# Altium PCB PCB.PcbDoc (part 2 of 3)
Units mm, origin at the board's own origin, x right, y up, seen from the top; angles counter-clockwise.
Board outline 50 x 32.5 mm, 10 copper layers (Top (GND), L2 (HS), L3 (GND), L4 (VCC), L5 (S), L6 S(), L7 (VCC), L8 (GND), L9 (VCC), Bottom (S)), stack 1.18 mm thick; 115 components, 126 nets, 603 pads, 417 vias.
Unrouted connection lines stored in the file: 2.
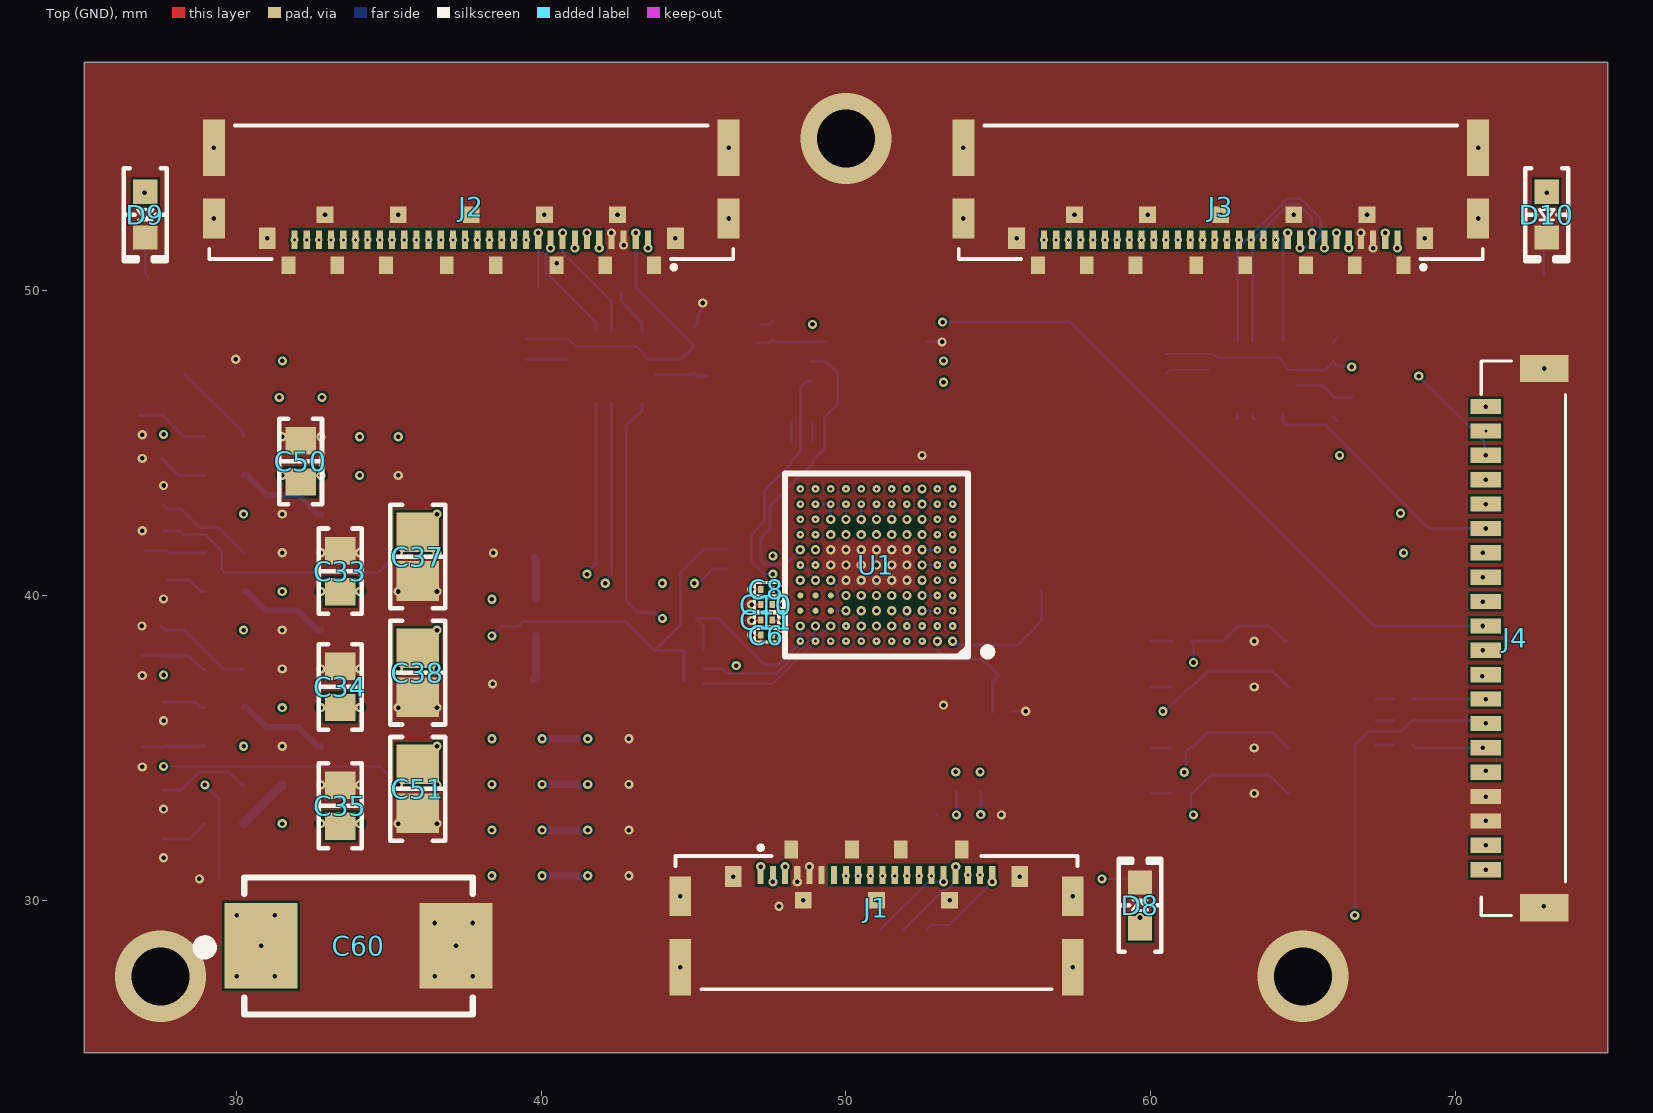
[diagram p0: Top (GND) view]

## Via types
v1: diameter 0.3, hole 0.15, Top (GND) to Bottom (S), 287 vias
v2: diameter 0.25, hole 0.1, Top (GND) to L2 (HS), 104 vias
v3: diameter 0.25, hole 0.1, L9 (VCC) to Bottom (S), 22 vias
v4: diameter 3, hole 1.9, Top (GND) to Bottom (S), 3 vias
v5: diameter 0.25, hole 0.1, Top (GND) to Bottom (S), 1 vias

## Nets (pads, with @x,y where several pads share a name; then routed paths per layer and width w, separated by ;. In a path a pad name is that pad's centre, name@x,y a point inside that pad or via, vN(x,y) a via of type N, cw(c..) or ccw(c..) an arc to the next point about the centre after c; other vN are vias at no path point) (continued)
AUX_P: C1.1 J1.18 R42.1 U1.B5 | length 10
  L2 (HS) w0.071: v1(53.625,32.8) 53.63,32.8 53.785,32.645 cw(c53.411,32.272) 53.939,32.272 53.939,32.041 ccw(c54.238,32.041) 54.027,31.83 cw(c53.816,31.618) 54.114,31.618 54.114,31.101 cw(c53.841,31.101) 54.034,30.907 ccw(c54.117,30.825) v2(54,30.825)
  L5 (S) w0.083: v1(51.5,39) 51.5,34.925 v1(53.625,32.8)
  Bottom (S) w0.1: C1.1@53.6,33.59 53.625,33.565 v1(53.625,32.8)
CONFIG1: J1.16 R45.2 | length 2.7
  Bottom (S) w0.075: R45.2@51.15,29.005 51.15,29.05 52.7,30.6 v1(53.2,30.6)
CONFIG2: J1.17 R44.2 | length 2.9
  Bottom (S) w0.075: R44.2@51.9,29.005 51.9,29.05 53.187,30.337 53.26,30.337 53.309,30.338 53.6,30.629 v1(53.6,31.1)
DP0_N: J1.14 U1.A5 | length 8
  L2 (HS) w0.071: v2(51.5,38.5) ccw(c51.551,38.5) v2@51.515,38.464 ; v2@51.515,38.464 51.582,38.397 cw(c51.384,38.198) 51.664,38.198 51.664,34.012 ccw(c53.055,34.012) 52.072,33.028 52.2,32.9 cw(c51.441,32.141) 52.514,32.141 52.514,31.076 cw(c52.257,31.076) 52.439,30.894 ccw(c52.533,30.8) v2(52.4,30.8)
DP0_P: J1.15 U1.A4 | length 8
  L2 (HS) w0.071: v2(52,38.5) cw(c51.949,38.5) 51.985,38.464 51.918,38.397 ccw(c52.116,38.198) 51.836,38.198 51.836,34.012 ccw(c53.055,34.012) 52.193,33.15 52.321,33.021 cw(c51.441,32.141) 52.686,32.141 52.686,31.076 ccw(c52.943,31.076) 52.761,30.894 cw(c52.667,30.8) v2(52.8,30.8)
DP1_N: J1.12 U1.A7 | length 8.1
  L2 (HS) w0.071: v2(50.5,38.5) ccw(c50.551,38.5) v2@50.515,38.464 ; v2@50.515,38.464 50.582,38.397 cw(c50.384,38.198) 50.664,38.198 50.664,33.912 ccw(c52.055,33.912) 51.072,32.928 51.357,32.643 cw(c50.495,31.781) 51.714,31.781 51.714,31.076 cw(c51.457,31.076) 51.639,30.894 ccw(c51.733,30.8) v2(51.6,30.8)
DP1_P: J1.13 U1.A6 | length 8.1
  L2 (HS) w0.071: v2(51,38.5) cw(c50.949,38.5) 50.985,38.464 50.918,38.397 ccw(c51.116,38.198) 50.836,38.198 50.836,33.912 ccw(c52.055,33.912) 51.193,33.05 51.478,32.764 cw(c50.495,31.781) 51.886,31.781 51.886,31.076 ccw(c52.143,31.076) 51.961,30.894 cw(c51.867,30.8) v2(52,30.8)
DP2_N: J1.10 U1.A9 | length 8.2
  L2 (HS) w0.071: v2(49.5,38.5) ccw(c49.551,38.5) v2@49.515,38.464 ; v2@49.515,38.464 49.582,38.397 cw(c49.384,38.198) 49.664,38.198 49.664,33.711 ccw(c50.811,33.711) 50,32.9 50.571,32.329 cw(c49.742,31.5) 50.914,31.5 50.914,31.076 cw(c50.657,31.076) 50.839,30.894 ccw(c50.933,30.8) v2(50.8,30.8)
DP2_P: J1.11 U1.A8 | length 8.2
  L2 (HS) w0.071: v2(50,38.5) cw(c49.949,38.5) 49.985,38.464 49.918,38.397 ccw(c50.116,38.198) 49.836,38.198 49.836,33.711 ccw(c50.811,33.711) 50.121,33.021 50.692,32.45 cw(c49.742,31.5) 51.086,31.5 51.086,31.076 ccw(c51.343,31.076) 51.161,30.894 cw(c51.067,30.8) v2(51.2,30.8)
DP3_N: J1.8 U1.A11 | length 8.3
  L2 (HS) w0.071: v2(48.5,38.5) ccw(c48.551,38.5) v2@48.515,38.464 ; v2@48.515,38.464 48.582,38.397 cw(c48.384,38.198) 48.664,38.198 48.664,33.712 ccw(c50.055,33.712) 49.072,32.728 49.912,31.888 cw(c49.424,31.4) 50.114,31.4 50.114,31.076 cw(c49.857,31.076) 50.039,30.894 ccw(c50.133,30.8) v2(50,30.8)
DP3_P: J1.9 U1.A10 | length 8.3
  L2 (HS) w0.071: v2@48.985,38.464 48.918,38.397 ccw(c49.116,38.198) 48.836,38.198 48.836,33.712 ccw(c50.055,33.712) 49.193,32.85 50.033,32.009 cw(c49.424,31.4) 50.286,31.4 50.286,31.076 ccw(c50.543,31.076) 50.361,30.894 cw(c50.267,30.8) v2(50.4,30.8) ; v2@48.985,38.464 ccw(c48.949,38.5) v2(49,38.5)
EN_TX0: J2.5 J4.10 | length 37.7
  L5 (S) w0.1: v1(41.9,51.4) 41.938,51.362 42.377,51.362 42.514,51.225 42.839,51.225 43.289,51.675 44.061,51.675 48.461,47.275 64.125,47.275 68.367,43.033 68.367,42.867 v1(68.2,42.7) ; v1(68.3,41.4) 68.3,38.417 68.517,38.2 v1(70.9,38.2)
  L6 S() w0.1: v1(68.2,42.7) 68.2,41.5 v1(68.3,41.4)
EN_TX1: J3.5 J4.16 | length 10.6
  L5 (S) w0.1: v1(66.5,51.4) 66.5,49.453 66.325,49.278 66.325,47.386 68.508,45.204 68.749,45.204 70.953,43 v1(71,43)
EN_VAUX: J4.5 R21.1 U2.K7 | length 49.9
  L6 S() w0.1: v1(28.956,33.782) 32.488,30.25 41.875,30.25 43.625,28.5 61,28.5 66.75,34.25 v1(71,34.25)
  Bottom (S) w0.1: v1(28.956,33.782) 29.425,33.313 R21.1@29.425,30.7